# EAGLE board Template (EAGLE 5.11)

Size 100 x 80 mm. Coordinates in mm from the lower left corner, seen from the top.
Outline: 0,0 100,0 100,80 0,80 0,0
Copper layers (1*16): Top 0.035mm / dielectric 1.5mm / Bottom 0.035mm
Design rules "default": minimum track width 10mil, minimum drill 24mil, track to track 8mil, track to pad 8mil, pad to pad 8mil, via to via 8mil, smd to smd 8mil, copper to edge 40mil, drill to drill 8mil, minimum pad ring 10mil, minimum via ring 8mil, stop-mask expansion 4mil, vias tented up to drill 0mil, thermal gap 10mil

## Footprints (pad centres in the part's own frame; a part is rotated, then mirrored left to right if it is on the bottom)
3,6 = hole 3.6: 0,0
1X02 = drill 1.016 long: 1 -1.27,0; 2 1.27,0
1X12 = drill 1.016 long: 1 -13.97,0; 2 -11.43,0; 3 -8.89,0; 4 -6.35,0; 5 -3.81,0; 6 -1.27,0; 7 1.27,0; 8 3.81,0; 9 6.35,0; 10 8.89,0; 11 11.43,0; 12 13.97,0
1X04 = drill 1.016 long: 1 -3.81,0; 2 -1.27,0; 3 1.27,0; 4 3.81,0
1X10 = drill 1.016 long: 1 -11.43,0; 2 -8.89,0; 3 -6.35,0; 4 -3.81,0; 5 -1.27,0; 6 1.27,0; 7 3.81,0; 8 6.35,0; 9 8.89,0; 10 11.43,0

## Placement (x,y rotation side)
E$2  [3,6]  15,5 0 top
E$3  [3,6]  85,5 0 top
E$4  [3,6]  85,75 0 top
E$5  [3,6]  15,75 0 top
I2C_L  [1X02]  3,75 90 top
I2C_R  [1X02]  97,75 90 top
PINS_L  [1X12]  3,29 90 top
PINS_R  [1X12]  97,29 90 top
POWER_L  [1X04]  3,7 90 top
POWER_R  [1X04]  97,7 90 top
RELAY_L  [1X10]  3,58 90 top
RELAY_R  [1X10]  97,58 90 top

## Library data of the parts
E$2-E$5 = holes
I2C_L I2C_R PINS_L PINS_R POWER_L POWER_R RELAY_L RELAY_R = pinhead